# Altium PCB PCB2.PcbDoc
Units mil, origin at the board's own origin, x right, y up, seen from the top; angles counter-clockwise.
Board outline 1020 x 1350 mil, 2 copper layers (Top Layer, Bottom Layer); 12 components, 8 nets, 70 pads, 0 vias.
Unrouted connection lines stored in the file: 3.
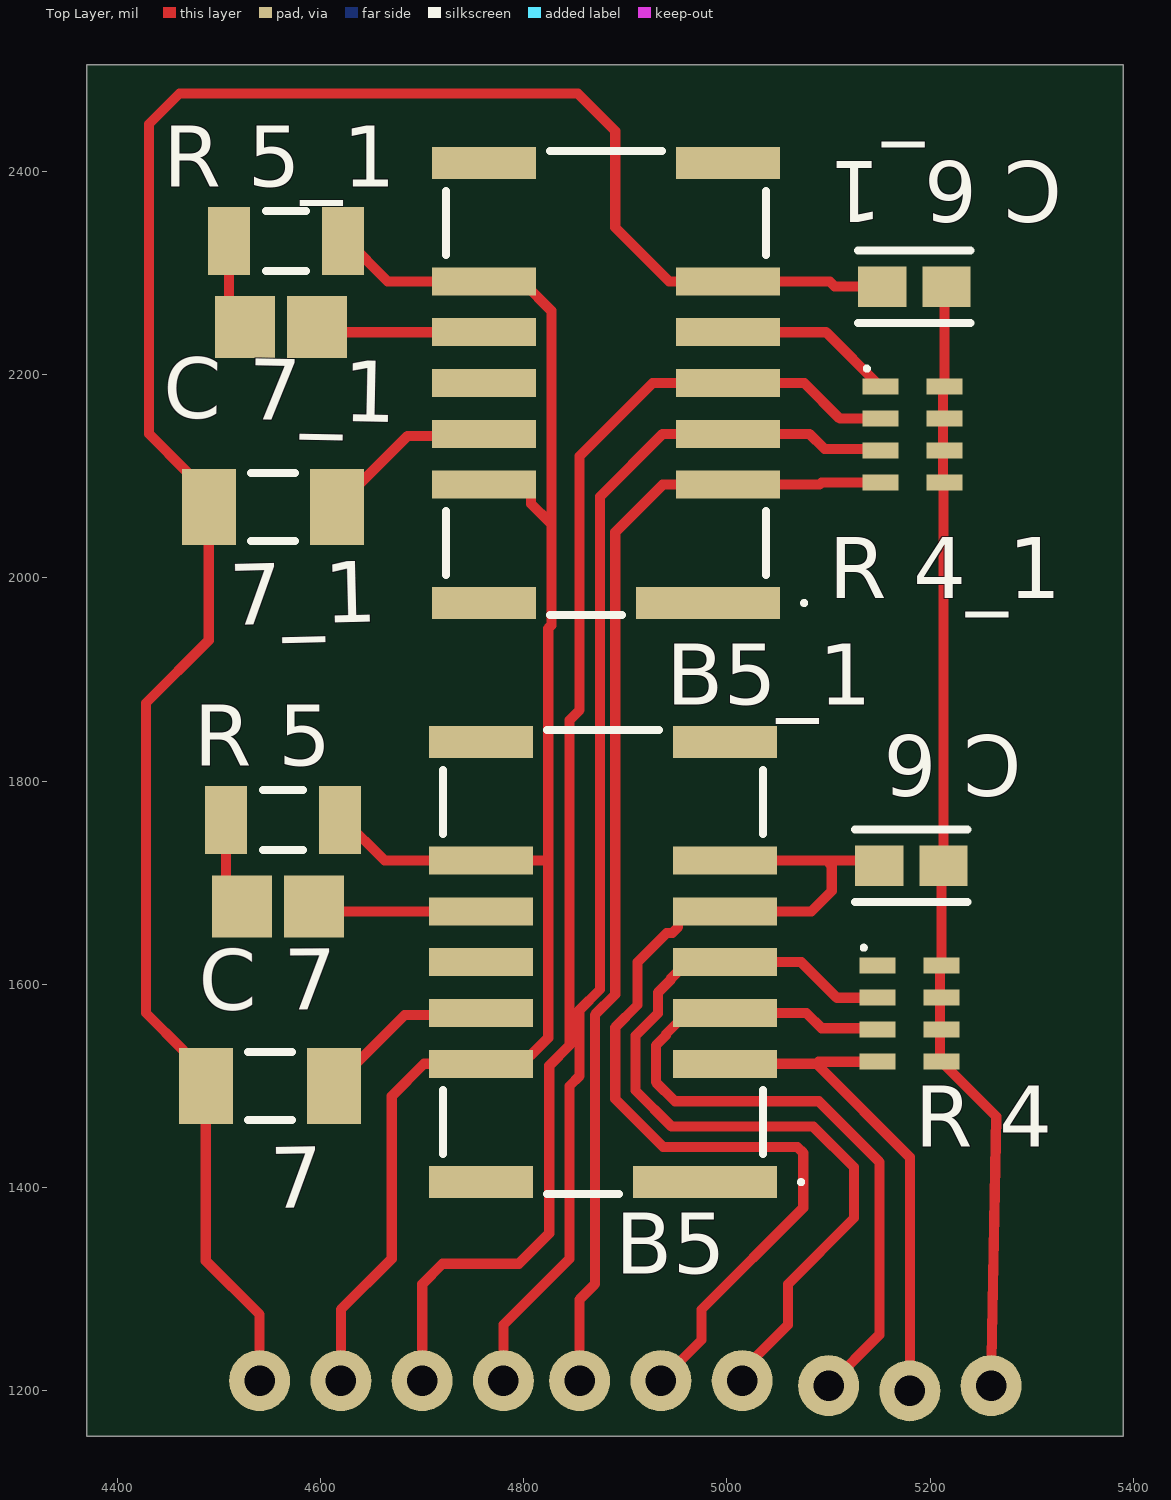
[diagram p0: Top Layer view]
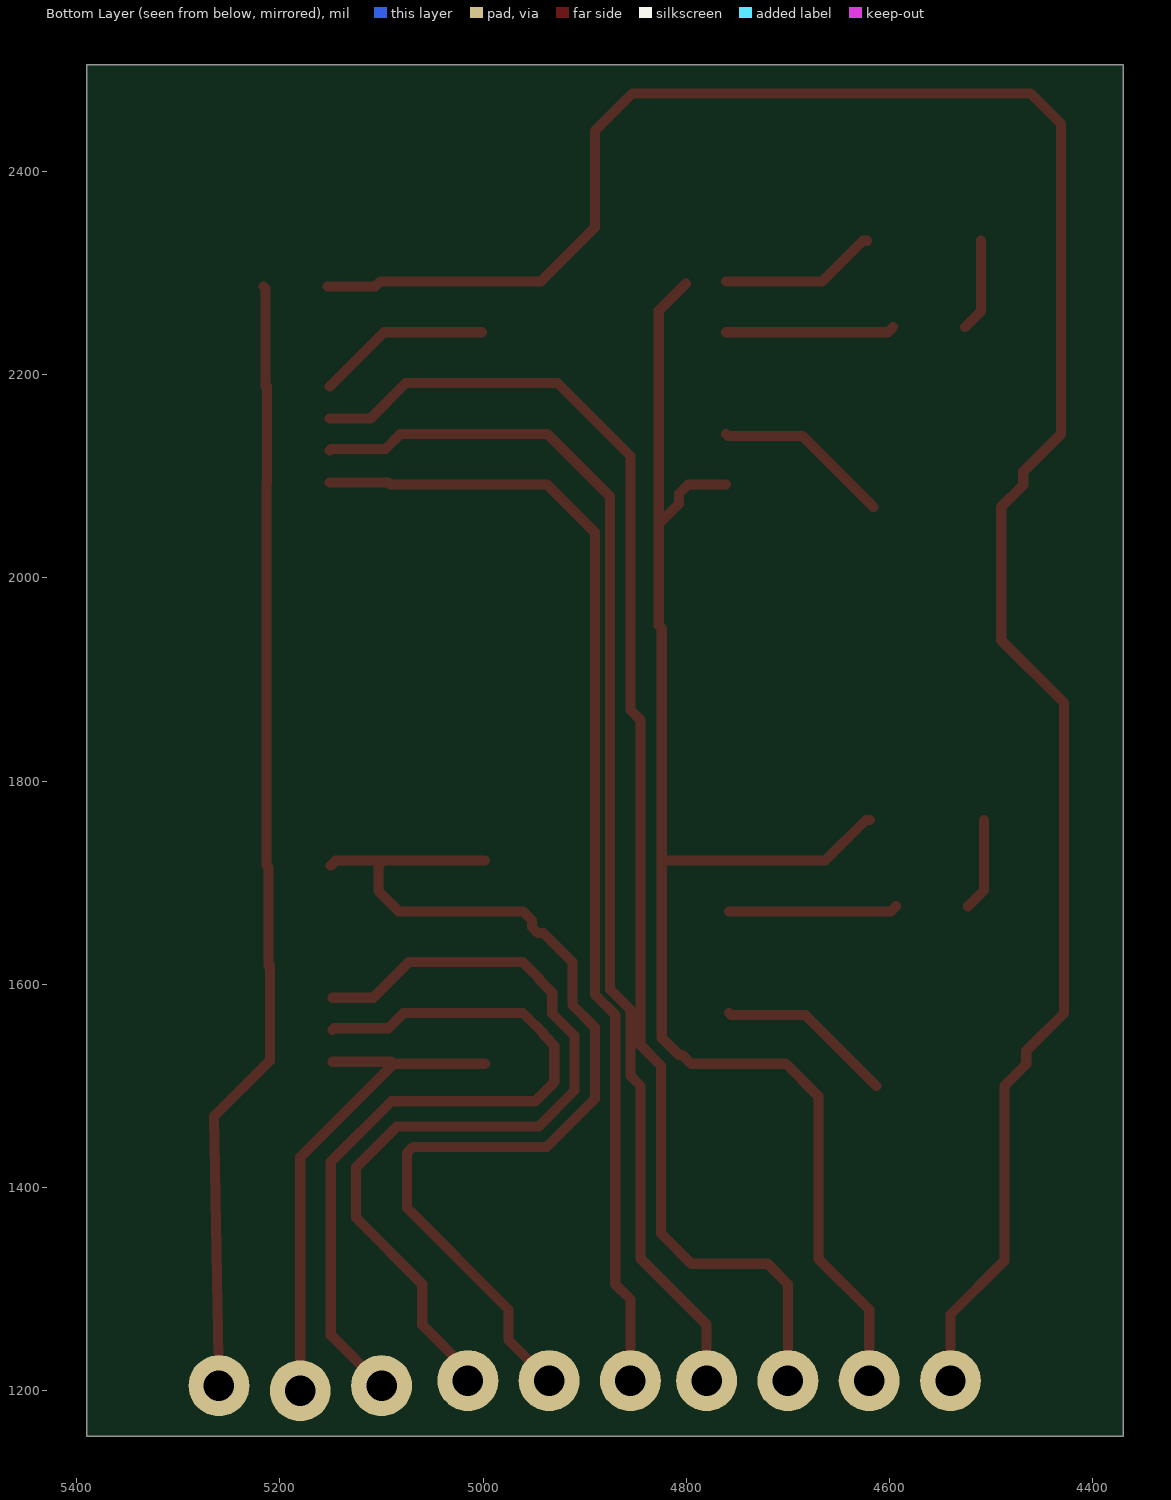
[diagram p1: Bottom Layer view, seen from below]

## Layer stack, top to bottom
Top Solder: solder mask 0.4, Solder Resist, Dk 3.5
Top Layer: signal copper 1.4
Dielectric 1: dielectric 12.6, FR-4, Dk 4.8
Bottom Layer: signal copper 1.4
Bottom Solder: solder mask 0.4, Solder Resist, Dk 3.5

## Board outline
4370,1155 5390,1155 5390,2505 4370,2505

## Design rules (kind name [scope] priority, off if disabled: settings)
Clearance [All] p1: gap=10 ignorepadtopadclearanceinfootprint=FALSE except(0: Arc-Hole Track-Hole SMDPad-Hole THPad-Hole Via-Hole Fill-Hole Poly-Hole Region-Hole Text-Hole)
PolygonConnect [All] p1: connectstyle=Relief reliefconductorwidth=10 reliefentries=4 polygonreliefangle="90 Angle" airgapwidth=10
RoomDefinition Sheet1 [InComponentClass('Sheet1')] p1: confinementstyle=ConfineIn formatcopy=TRUE lockcomponents=FALSE outline 4385,1160 5375,1160 5375,2490 4385,2490
RoutingVias [All] p1: holewidth=28 width=50 viastyle="Through Hole" minholewidth=28 minwidth=50 maxholewidth=28 maxwidth=50
SolderMaskExpansion [All] p1: expansion=4 istentingtop=FALSE
Width [All] p1: maxlimit=10 minlimit=10 preferedwidth=10
30 further rules are at their usual default settings.

## Classes and differential pairs
component class Sheet1: 7 B5 "C 6" "C 7" "R 4" "R 5"

## Components (designator, comment, footprint, x,y, rotation, side; value= is the part's Value field where it differs from the comment)
7 "CAP 1.5uF 16V 1206(3216)" CAPC1206(3216)190_M 4550,1500 r180 top value=1.5uF
7_1 "CAP 1.5uF 16V 1206(3216)" CAPC1206(3216)190_M 4552.99,2070 r180 top value=1.5uF (schematic designator 7)
B5 "AMG8854" AMG8854 4878.06,1621.86 r90 top
B5_1 "AMG8854" AMG8854 4881.05,2191.86 r90 top (schematic designator B5)
"C 6" "GRM188R60J106ME47D" FP-GRM188-0_1-e0_2_0_55-IPC_A 5181.57,1716.86 r180 top
"C 6_1" "GRM188R60J106ME47D" FP-GRM188-0_1-e0_2_0_55-IPC_A 5184.56,2286.86 r180 top (schematic designator "C 6")
"C 7" "C0805C105K8RACTU" CAPC2013X100X50ML20T25 4558.14,1676.86 r180 top
"C 7_1" "C0805C105K8RACTU" CAPC2013X100X50ML20T25 4561.13,2246.86 r180 top (schematic designator "C 7")
"R 4" "CAT16-103J4LF" BOUR-CAT16-103J4LF_L 5179.64,1571.11 r0 top
"R 4_1" "CAT16-103J4LF" BOUR-CAT16-103J4LF_L 5182.63,2141.11 r0 top (schematic designator "R 4")
"R 5" "RC1206JR-0720RL" RESC3116X65X40NL10T20 4563.14,1761.86 r0 top
"R 5_1" "RC1206JR-0720RL" RESC3116X65X40NL10T20 4566.13,2331.86 r0 top (schematic designator "R 5")

## Footprints (in the part's own frame and the unit in brackets; to place one, negate y for a bottom-side part, rotate by r counter-clockwise, add the part's x,y. Pads: shape width x height; smd on the part's side, far side on the other; paste and mask are expansions set on the pad)
AMG8854 [mm]
  rect 0.8x3.6 smd: 1(-5.5,-2.55)
  rect 0.7x2.6 smd: 2(-2.54,-3.05) 3(-1.27,-3.05) 4(0,-3.05) 5(1.27,-3.05) 6(2.54,-3.05) 9(2.54,3.05) 10(1.27,3.05) 11(0,3.05) 12(-1.27,3.05) 13(-2.54,3.05)
  rect 0.8x2.6 smd: 7(5.5,-3.05) 8(5.5,3.05) 14(-5.5,3.05)
  silkscreen extent -5.8,-5 5.8,4
BOUR-CAT16-103J4LF_L [mm] "Chip Array, 8-Leads, Body 3.4x1.6mm, Pitch 0.8mm, IPC High Density"
  rect 0.9x0.4 smd: 1(-0.8,1.2) 2(-0.8,0.4) 3(-0.8,-0.4) 4(-0.8,-1.2) 5(0.8,-1.2) 6(0.8,-0.4) 7(0.8,0.4) 8(0.8,1.2)
  silkscreen extent -1.19,1.6 -1.09,1.7, body extent -0.95,-1.7 0.95,1.7, height 0.6
CAPC1206(3216)190_M [mm] "Chip Capacitor, Body 3.2x1.6mm, Height 1.9mm, IPC Low Density"
  rect 1.35x1.9 smd: 1(-1.6,0) 2(1.6,0)
  silkscreen extent -0.55,-0.85 0.55,0.85, body extent -1.7,-0.9 1.7,0.9, height 1.9
CAPC2013X100X50ML20T25 [mm] "Chip Capacitor, 2-Leads, Body 2.00x1.25mm, IPC Low Density"
  rect 1.5x1.55 smd: 1(-0.9,0) 2(0.9,0)
  body extent -1.1,-0.72 1.1,0.72, height 1
FP-GRM188-0_1-e0_2_0_55-IPC_A [mil]
  rect 47.57x39.85 smd paste+0 mask+0: 1(-31.57,0) 2(31.57,0)
  silkscreen extent -55,-36 55,36, body extent -75,-40 75,40, height 10
RESC3116X65X40NL10T20 [mm] "Chip Resistor, 2-Leads, Body 3.10x1.60mm, IPC Medium Density"
  rect 1.05x1.7 smd: 1(-1.425,0) 2(1.425,0)
  silkscreen extent -0.5,-0.75 0.5,0.75, body extent -1.6,-0.85 1.6,0.85, height 0.65

## Part data
7 7_1: library part CMP-1037-04758-1, "CAP 1.5uF 16V ±10% 1206 (3216 Metric) Thickness 1.9mm SMD", Case-EIA=1206, Case-Metric=3216, Rated Voltage="16 V", Tolerance=Â±10%, Max Thickness="1.9 mm", Technology=SMT
B5 B5_1: "Product: Infrared Array Sensor Grid-EYE, Series/Type: AMG88xx (High performance type), Number of pixel: 64 (Vertical 8 x Horizontal 8 Matrix), Operating voltage (DC) (V): 5, Viewing angle (): 60, Amplification factor: Low gain, Mounting form: Surface Mount Type", Manufacturer_Name=Panasonic, Mouser Part Number=667-AMG8854, Datasheet Link=https://industrial.panasonic.com/cdbs/www-data/pdf/ADI8000/ADI8000C66.pdf, Geometry.Height=4.3mm, Manufacturer_Part_Number=AMG8854, Mouser Price/Stock=https://www.mouser.co.uk/ProductDetail/Panasonic/AMG8854?qs=sSYV1F9c5cGiWvzHDbpBOw%3D%3D
"C 6" "C 6_1": library part CMP-2006-02792-2, "Chip Multilayer Ceramic Capacitors for General Purpose, 0603, 10uF, X5R, 15%, 20%, 6.3V", Capacitance=10uF, Case Code (Imperial)=0603, Case Code (Metric)=1608, Dielectric=X5R, Max Operating Temperature=85°C, Min Operating Temperature=-55°C, Package Quantity=4000, Tolerance=20%, Voltage=6.3V, Case/Package=0603, Depth=0.8mm, Height=0.8mm, Lead Free="Lead Free", Length=1.6mm, Material=Ceramic, Mount="Surface Mount", Packaging="Tape and Reel", Radiation Hardening=No, REACH SVHC="No SVHC", Termination=SMD/SMT, Thickness=0.035inch, Voltage Rating=6.3V, Voltage Rating (DC)=6.3V, Width=0.031inch
"C 7" "C 7_1": library part CMP-2007-03676-1, Manufacturer=Kemet, Part Number=C0805C105K8RACTU
"R 4" "R 4_1": library part CMP-2000-06067-1, "CAT / CAY 16 Series - Chip Resistor Array, 10 KOhm, +/- 5%, 50 V, -55 to 125 degC, 8-Pin SMD, RoHS, Tape and Reel", Manufacturer=Bourns, Number of Resistors=4, Operating Temperature=-55°C~125°C, Package / Case=1206(3216Metric),Concave,LongSideTerminals, Package Description="8-Pin Surface Mount Device, Body 3.2 x 1.55 mm, Pitch 0.8 mm", Power Per Element=62.5mW, Resistance (Ohms)=10k, Standard Package=1, Supplier Device Package=1206, Temperature Coefficient=±200ppm/°C, Tolerance=±5%, Applications=-, Category=Resistors, Circuit Type=Isolated, Datasheet URL=http://www.mouser.com/ds/2/54/ATCAY-777361.pdf, Datasheet Version=09/2014, EDA / CAD Models=DownloadfromAcceleratedDesigns, Family=ResistorNetworks,Arrays, Height="0.024\"(0.60mm)", Manufacturer URL=http://www.bourns.com/, Mounting Technology=SurfaceMount, Mounting Type=SurfaceMount, Number of Pins=8, Online Catalog=CAT16Series, Other Names=CAT16-103J4LFDKR, Package Reference=CAT16-103J4LF, Packaging=Digi-Reel®, RoHS Information=CAT16MaterialDeclaration, Series=CAT16, Size / Dimension="0.126\"Lx0.061\"W(3.20mmx1.55mm)"
"R 5" "R 5_1": library part CMP-2003-03957-1, Manufacturer=Yageo, Part Number=RC1206JR-0720RL

## Free pads (board coordinates)
  round 60 hole 30: 2(4540,1210) 2(4935,1210) 3(4620,1210) 3(5260,1205) 4(4700,1210) 5(4780,1210) 6(4855,1210) 7(5015,1210) 8(5100,1205) 9(5180,1200)

## Nets (pads, with @x,y where several pads share a name; then routed paths per layer and width w, separated by ;. In a path a pad name is that pad's centre, name@x,y a point inside that pad or via, vN(x,y) a via of type N, cw(c..) or ccw(c..) an arc to the next point about the centre after c; other vN are vias at no path point)
+5: "C 6.1" "R 4.5" "R 4.6" "R 4.7" "R 4.8" "R 5.2" B5.9 B5.13 B5_1.9 B5_1.13 pad.3 | length 2545.4
  Top Layer w10: 4619.24,1761.86 4623.14,1761.86 4663.14,1721.86 B5.9 4820,1721.86 4824.16,1721.86 ; pad.3@4620,1210 4620,1280 4670,1330 4670,1490 4701.86,1521.86 4795.38,1521.86 4804.16,1530.64 4807.36,1530.64 4824.16,1547.45 4824.16,1721.86 ; B5_1.13 4798.38,2091.86 4807.15,2083.08 4807.15,2073.08 4825,2055.24 4826.15,2055.24 ; B5_1.9@4800.24,2290 4827.15,2263.08 4827.15,2122.87 ; 4827.15,2121.87 4827.15,1953.36 4824.16,1950.37 4824.16,1721.86 ; 5209.64,1524.62 5209.64,1618.36 ; 5211.13,1523.87 5265,1470 pad.3@5260,1205 ; 5211.13,1618.36 5211.13,1714.85 5213.14,1716.86 5213.14,2093.87 ; 5212.63,2094.62 5212.63,2188.36
GND: 7.2 "C 6.2" B5.5 B5.6 B5_1.6 pad.2 | length 1974.8
  Top Layer w10: 4490,2070 4490,1938.72 4428.14,1876.86 4428.14,1571.86 4465.43,1534.57 4465.43,1521.57 7.2 4487.01,1327.99 4540,1275 pad.2@4540,1210 ; pad.2@4935,1210 4975,1250 4975,1280 5075,1380 5075,1434.14 5069.14,1440 4937.26,1440 4890,1487.26 4890,1557.69 4911.96,1579.65 4911.96,1621.85 4940.74,1650.64 4946.1,1650.64 4951.96,1656.5 4951.96,1663.08 4960.74,1671.86 5083.14,1671.86 5103.14,1691.86 5103.14,1716.86 5098.14,1721.86 ; B5.6 5098.14,1721.86 ; 5150,1716.86 5145,1721.86 5098.14,1721.86
Net7_1: 7.1 B5.12 | length 174.8
  Top Layer w10: 7.1 4682.85,1569.85 4755.97,1569.85 B5.12
NetB5_2: "R 4.4" B5.2 pad.9 | length 510.7
  Top Layer w10: B5.2 5088.14,1521.86 ; 5148.14,1523.87 5090.15,1523.87 5088.14,1521.86 ; pad.9 5180,1430 5088.14,1521.86
NetB5_3: "R 4.3" B5.3 pad.8 | length 768.5
  Top Layer w10: pad.8 5150,1255 5150,1425.28 5090.27,1485 4948.83,1485 4930,1503.83 4930,1539.9 4940,1549.9 4940,1551.12 4960.74,1571.86 B5.3 5078.14,1571.86 5093.14,1556.86 5146.64,1556.86 5148.14,1555.36
NetB5_4: "R 4.2" B5.4 pad.7 | length 851.1
  Top Layer w10: pad.7 5015,1220 5060,1265 5060,1305 5125,1370 5125,1420 5085,1460 4945.54,1460 4910,1495.54 4910,1549.41 4931.96,1571.37 4931.96,1591.85 4945,1604.9 4945,1606.12 4960.74,1621.86 5073.14,1621.86 5108.14,1586.86 5148.14,1586.86
NetB5_10: "C 7.1" B5.10 | length 166.5
  Top Layer w10: 4593.57,1676.86 4598.57,1671.86 B5.10
"NetC 7_2": "C 7.2" "R 5.1" | length 91.5
  Top Layer w10: 4507.04,1761.86 4507.04,1692.53 4522.71,1676.86
pads on no net: 7_1.1 7_1.2 "C 6_1.1" "C 6_1.2" "C 7_1.1" "C 7_1.2" "R 4.1" "R 4_1.1" "R 4_1.2" "R 4_1.3" "R 4_1.4" "R 4_1.5" "R 4_1.6" "R 4_1.7" "R 4_1.8" "R 5_1.1" "R 5_1.2" B5.1 B5.7 B5.8 B5.11 B5.14 B5_1.1 B5_1.2 B5_1.3 B5_1.4 B5_1.5 B5_1.7 B5_1.8 B5_1.10 B5_1.11 B5_1.12 B5_1.14
copper on no net: | length 5836.8
  Top Layer w10: 4490,2070 4468.43,2091.57 4468.43,2104.57 4431.13,2141.86 4431.13,2446.86 4461.13,2476.86 4853.14,2476.86 4890,2440 4890,2345 4943.14,2291.86 5001.13,2291.86 5101.13,2291.86 5106.13,2286.86 5152.99,2286.86 ; 4510.03,2331.86 4510.03,2262.53 4525.7,2246.86 ; 4596.56,2246.86 4601.56,2241.86 4760.97,2241.86 ; 4615.98,2070 4685.84,2139.85 4758.97,2139.85 4760.97,2141.86 ; 4622.23,2331.86 4626.13,2331.86 4666.13,2291.86 4760.97,2291.86 ; 4700,1210 4700,1305 4720,1325 4795,1325 4825,1355 4825,1520 4845,1540 4845,1860 4855,1870 4855,2120 4926.86,2191.86 5001.13,2191.86 5076.13,2191.86 5111.13,2156.86 5151.13,2156.86 ; 4780,1210 4780,1265 4845,1330 4845,1500 4855,1510 4855,1575 4875,1595 4875,2080 4936.86,2141.86 5001.13,2141.86 5081.13,2141.86 5096.13,2126.86 5149.64,2126.86 5151.13,2125.36 ; 4855,1210 4855,1290 4870,1305 4870,1570 4890,1590 4890,2045 4936.86,2091.86 5001.13,2091.86 5091.13,2091.86 5093.14,2093.87 5151.13,2093.87 ; 5001.13,2241.86 5097.63,2241.86 5151.13,2188.36 ; 5214.12,2188.36 5214.12,2284.85 5216.13,2286.86